# Altium PCB InstallGuide.PcbDoc (part 2 of 2)
Units mil, origin at the board's own origin, x right, y up, seen from the top; angles counter-clockwise.
Board outline 6000 x 4000 mil, 2 copper layers (Top Layer, Bottom Layer); 26 components, 17 nets, 116 pads, 67 vias.
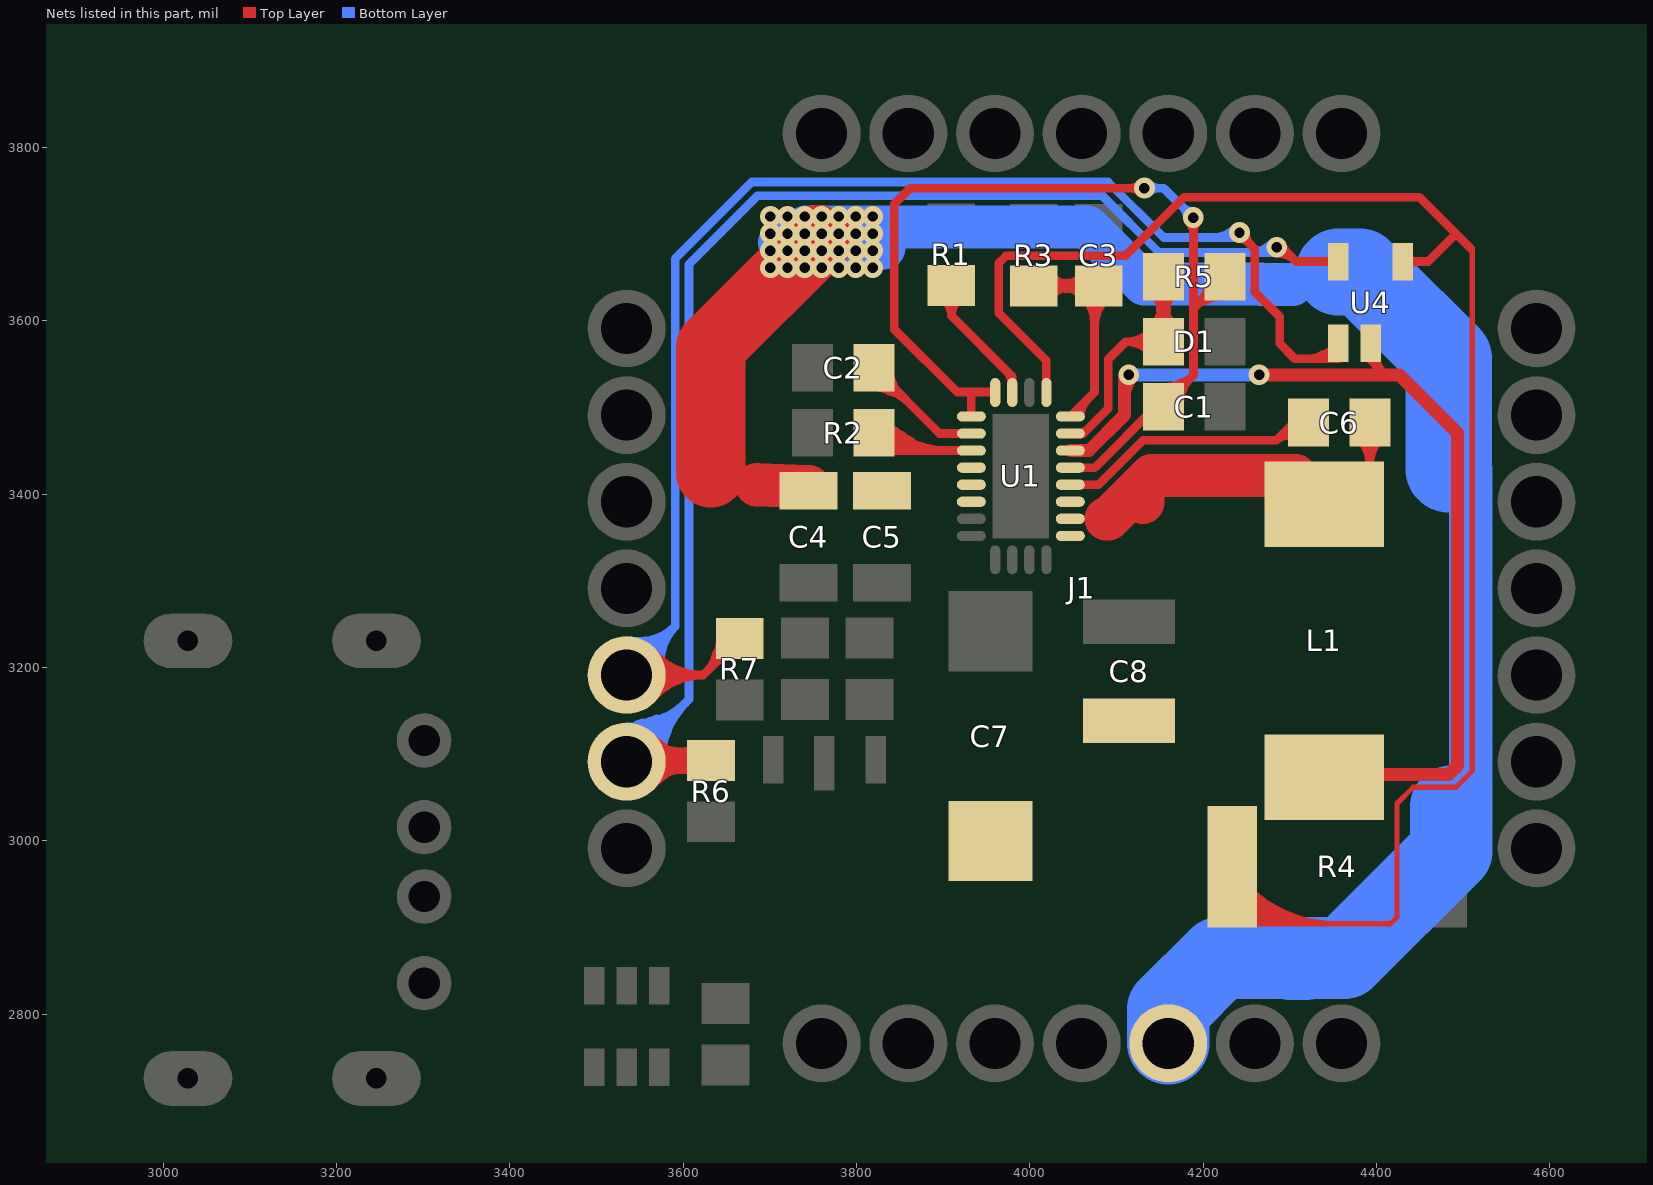
[diagram p2: the nets of this part, all layers, seen from the top]

## Via types
v1: diameter 24, hole 12, Top Layer to Bottom Layer, 62 vias
v2: diameter 35.43, hole 19.68, Top Layer to Bottom Layer, 4 vias
v3: diameter 36, hole 24, Top Layer to Bottom Layer, 1 vias

## Nets (pads, with @x,y where several pads share a name; then routed paths per layer and width w, separated by ;. In a path a pad name is that pad's centre, name@x,y a point inside that pad or via, vN(x,y) a via of type N, cw(c..) or ccw(c..) an arc to the next point about the centre after c; other vN are vias at no path point) (continued)
ISP: C7.1 C8.1 L1.2 R4.1 U1.18 U1.21 U4.1 U4.5 | length 6098.4
  Top Layer w6: R4.1@4231.21,2938.97 cw(c4237.46,2913.89) R4.1@4261.98,2922.02 ; R4.1@4232.66,2933.14 cw(c4239.03,2907.6) 4264.02,2915.88 ; R4.1@4254.8,2949.09 4254.8,2907.56 4257.95,2904.41 4416.22,2904.41 4423.7,2911.89 4423.7,3042.99 4442.6,3061.89 4491.81,3061.89 4510.71,3080.79 4510.71,3681.78 4508.71,3683.78 ; L1.2@4339.72,3073.37 L1.2@4402.11,3073.37 ; R4.1@4226.35,2921.42 ccw(c4267.42,2962.5) 4267.42,2904.41 ; R4.1@4226.35,2921.42 ccw(c4267.42,2962.5) 4267.42,2904.41 ; R4.1@4226.35,2921.42 ccw(c4267.42,2962.5) 4267.42,2904.41 ; R4.1@4230.59,2925.67 ccw(c4281.91,2976.99) 4281.91,2904.41 ; R4.1@4230.59,2925.67 ccw(c4281.91,2976.99) 4281.91,2904.41 ; R4.1@4230.59,2925.67 ccw(c4281.91,2976.99) 4281.91,2904.41 ; R4.1@4234.83,2929.91 ccw(c4296.4,2991.47) 4296.4,2904.41 ; R4.1@4234.83,2929.91 ccw(c4296.4,2991.47) 4296.4,2904.41 ; R4.1@4234.83,2929.91 ccw(c4296.4,2991.47) 4296.4,2904.41 ; R4.1@4239.07,2934.15 ccw(c4310.88,3005.96) 4310.88,2904.41 ; R4.1@4239.07,2934.15 ccw(c4310.88,3005.96) 4310.88,2904.41 ; R4.1@4239.07,2934.15 ccw(c4310.88,3005.96) 4310.88,2904.41 ; R4.1@4242.56,2918.54 cw(c4253.3,2906.04) R4.1@4261.94,2920.07 ; R4.1@4242.56,2918.54 cw(c4253.3,2906.04) R4.1@4261.94,2920.07 ; R4.1@4242.56,2918.54 cw(c4253.3,2906.04) R4.1@4261.94,2920.07 ; R4.1@4243.32,2938.4 ccw(c4325.37,3020.44) 4325.37,2904.41 ; R4.1@4243.32,2938.4 ccw(c4325.37,3020.44) 4325.37,2904.41 ; R4.1@4243.32,2938.4 ccw(c4325.37,3020.44) 4325.37,2904.41 ; R4.1@4244.22,2912.32 cw(c4254.74,2895.78) 4264.54,2912.76 ; R4.1@4244.22,2912.32 cw(c4254.74,2895.78) 4264.54,2912.76 ; R4.1@4244.22,2912.32 cw(c4254.74,2895.78) 4264.54,2912.76 ; R4.1@4244.73,2920.9 cw(c4256.04,2912.76) 4263.92,2924.25 ; R4.1@4244.73,2920.9 cw(c4256.04,2912.76) 4263.92,2924.25 ; R4.1@4244.73,2920.9 cw(c4256.04,2912.76) 4263.92,2924.25 ; R4.1@4245.44,2906.11 cw(c4254.93,2887.71) 4265.28,2905.64 ; R4.1@4245.44,2906.11 cw(c4254.93,2887.71) 4265.28,2905.64 ; R4.1@4245.44,2906.11 cw(c4254.93,2887.71) 4265.28,2905.64 ; R4.1@4246.47,2913.99 cw(c4258.92,2899.5) 4268.93,2915.77 ; R4.1@4246.47,2913.99 cw(c4258.92,2899.5) 4268.93,2915.77 ; R4.1@4246.47,2913.99 cw(c4258.92,2899.5) 4268.93,2915.77 ; R4.1@4247.44,2907.26 cw(c4260.73,2886.35) 4273.11,2907.81 ; R4.1@4247.44,2907.26 cw(c4260.73,2886.35) 4273.11,2907.81 ; R4.1@4247.44,2907.26 cw(c4260.73,2886.35) 4273.11,2907.81 ; R4.1@4247.56,2942.64 ccw(c4339.85,3034.93) 4339.85,2904.41 ; R4.1@4247.56,2942.64 ccw(c4339.85,3034.93) 4339.85,2904.41 ; R4.1@4247.56,2942.64 ccw(c4339.85,3034.93) 4339.85,2904.41 ; R4.1@4249.6,2917.4 cw(c4261.02,2909.17) 4268.98,2920.77 ; R4.1@4249.6,2917.4 cw(c4261.02,2909.17) 4268.98,2920.77 ; R4.1@4249.6,2917.4 cw(c4261.02,2909.17) 4268.98,2920.77 ; R4.1@4250.38,2909.44 cw(c4264.54,2892.96) 4275.93,2911.46 ; R4.1@4250.38,2909.44 cw(c4264.54,2892.96) 4275.93,2911.46 ; R4.1@4250.38,2909.44 cw(c4264.54,2892.96) 4275.93,2911.46 ; R4.1@4251.8,2946.88 ccw(c4354.34,3049.42) 4354.34,2904.41 ; R4.1@4251.8,2946.88 ccw(c4354.34,3049.42) 4354.34,2904.41 ; R4.1@4251.8,2946.88 ccw(c4354.34,3049.42) 4354.34,2904.41 ; R4.1@4252.62,2923.76 ccw(c4264.82,2920.49) R4.1@4258.5,2909.55 ; R4.1@4252.62,2923.76 ccw(c4264.82,2920.49) R4.1@4258.5,2909.55 ; R4.1@4252.62,2923.76 ccw(c4264.82,2920.49) R4.1@4258.5,2909.55 ; R4.1@4252.75,2933.34 ccw(c4274.28,2938.46) 4262.68,2919.62 ; R4.1@4252.75,2933.34 ccw(c4274.28,2938.46) 4262.68,2919.62 ; R4.1@4252.75,2933.34 ccw(c4274.28,2938.46) 4262.68,2919.62 ; R4.1@4253.25,2929.95 ccw(c4273.74,2931.15) 4263.48,2913.37 ; R4.1@4253.25,2929.95 ccw(c4273.74,2931.15) 4263.48,2913.37 ; R4.1@4253.25,2929.95 ccw(c4273.74,2931.15) 4263.48,2913.37 ; R4.1@4254.47,2913.89 cw(c4266,2905.59) 4274.04,2917.3 ; R4.1@4254.47,2913.89 cw(c4266,2905.59) 4274.04,2917.3 ; R4.1@4254.47,2913.89 cw(c4266,2905.59) 4274.04,2917.3 ; R4.1@4258.41,2922.21 ccw(c4272.64,2918.4) 4265.28,2905.64 ; R4.1@4258.41,2922.21 ccw(c4272.64,2918.4) 4265.28,2905.64 ; R4.1@4258.41,2922.21 ccw(c4272.64,2918.4) 4265.28,2905.64 ; R4.1@4258.59,2934.73 ccw(c4294.21,2943.2) 4275.01,2912.02 ; R4.1@4258.59,2934.73 ccw(c4294.21,2943.2) 4275.01,2912.02 ; R4.1@4258.59,2934.73 ccw(c4294.21,2943.2) 4275.01,2912.02 ; R4.1@4258.85,2933.49 ccw(c4274.79,2936.45) 4265.61,2923.09 ; R4.1@4258.85,2933.49 ccw(c4274.79,2936.45) 4265.61,2923.09 ; R4.1@4258.85,2933.49 ccw(c4274.79,2936.45) 4265.61,2923.09 ; R4.1@4259.24,2930.3 ccw(c4287.04,2931.92) 4273.11,2907.81 ; R4.1@4259.24,2930.3 ccw(c4287.04,2931.92) 4273.11,2907.81 ; R4.1@4259.24,2930.3 ccw(c4287.04,2931.92) 4273.11,2907.81
  Top Layer w10: U1.21@4019.25,3517.32 4019.25,3554.17 3964.28,3609.14 3964.28,3666.73 3972.61,3675.06 4110.22,3675.06 4178.08,3742.91 4449.58,3742.91 4491.91,3700.58 ; U4.5@4393.31,3574.02 4393.31,3555.2 4407.14,3541.36 ; U4.1@4430.71,3668.5 4459.84,3668.5 4491.91,3700.58 ; 4508.71,3683.78 4491.91,3700.58 ; U4.5@4400.04,3563.13 ccw(c4425.02,3559.24) 4407.14,3541.36 ; U4.5@4400.04,3563.13 ccw(c4425.02,3559.24) 4407.14,3541.36 ; U4.5@4400.04,3563.13 ccw(c4425.02,3559.24) 4407.14,3541.36 ; U4.1@4435.52,3663.69 cw(c4447.15,3652.06) 4447.15,3668.5 ; U4.1@4435.52,3663.69 cw(c4447.15,3652.06) 4447.15,3668.5 ; U4.1@4435.52,3663.69 cw(c4447.15,3652.06) 4447.15,3668.5 ; U4.1@4435.52,3673.32 ccw(c4447.15,3684.95) 4447.15,3668.5 ; U4.1@4435.52,3673.32 ccw(c4447.15,3684.95) 4447.15,3668.5 ; U4.1@4435.52,3673.32 ccw(c4447.15,3684.95) 4447.15,3668.5
  Top Layer w15: U1.18@4046.81,3450.39 4068.34,3450.39 4109.22,3491.28 4109.22,3532.85 v1(4114.25,3537.87) ; R4.1@4233.74,2970.16 R4.1@4254.8,2949.09 ; v1(4264.65,3537.87) 4426.46,3537.87 4493.89,3470.44 4493.89,3086.81 4483.6,3076.52 4402.11,3076.52 L1.2@4402.11,3073.37 ; 4109.22,3514.87 cw(c4137.25,3514.87) v1@4117.43,3534.69 ; 4109.22,3514.87 cw(c4137.25,3514.87) v1@4117.43,3534.69 ; 4109.22,3514.87 cw(c4137.25,3514.87) v1@4117.43,3534.69 ; v1@4110.7,3535.12 cw(c4103.02,3529.16) 4111.43,3524.3 ; v1@4110.7,3535.12 cw(c4103.02,3529.16) 4111.43,3524.3 ; v1@4110.7,3535.12 cw(c4103.02,3529.16) 4111.43,3524.3
  Bottom Layer w15: v1(4114.25,3537.87) v1(4264.65,3537.87)
NetC1_2: C1.2 R5.1 U1.1 U1.17 U1.24 | length 2297.6
  Top Layer w10: U1.1@3932.64,3489.76 3932.64,3517.95 ; U1.24@3960.2,3517.32 3959.57,3517.95 3932.64,3517.95 ; U1.17@4046.81,3430.71 4075.2,3430.71 4145.35,3500.87 C1.2@4154.29,3500.87 4154.29,3502.68 4188.91,3537.31 ; v1(4132.36,3753.23) 3862.09,3753.23 3843.7,3734.84 3843.7,3590.55 3916.3,3517.95 3932.64,3517.95 ; C1.2@4152.01,3503.15 4154.29,3505.43 C1.2@4154.29,3515.87 ; v1@4188.98,3719.68 4188.91,3719.62 4188.91,3614.62 ; R5.1@4225.16,3650.87 4188.91,3614.62 ; 4115.46,3753.23 cw(c4115.46,3736.33) v1@4127.41,3748.28 ; 4115.46,3753.23 ccw(c4115.46,3770.13) v1@4127.41,3758.18 ; 4115.46,3753.23 cw(c4115.46,3736.33) v1@4127.41,3748.28 ; 4115.46,3753.23 ccw(c4115.46,3770.13) v1@4127.41,3758.18 ; 4115.46,3753.23 cw(c4115.46,3736.33) v1@4127.41,3748.28 ; 4115.46,3753.23 ccw(c4115.46,3770.13) v1@4127.41,3758.18 ; C1.2@4152.96,3505.17 cw(c4186,3495.92) 4177.67,3529.2 ; C1.2@4152.96,3505.17 cw(c4186,3495.92) 4177.67,3529.2 ; C1.2@4152.96,3505.17 cw(c4186,3495.92) 4177.67,3529.2 ; C1.2@4154.43,3513.42 ccw(c4154.84,3538.02) C1.2@4172.23,3520.62 ; C1.2@4154.43,3513.42 ccw(c4154.84,3538.02) C1.2@4172.23,3520.62 ; C1.2@4154.43,3513.42 ccw(c4154.84,3538.02) C1.2@4172.23,3520.62 ; C1.2@4154.51,3503.44 ccw(c4149.79,3532.59) 4178.31,3524.95 ; C1.2@4154.51,3503.44 ccw(c4149.79,3532.59) 4178.31,3524.95 ; C1.2@4154.51,3503.44 ccw(c4149.79,3532.59) 4178.31,3524.95 ; C1.2@4154.6,3523.42 ccw(c4155.38,3570.84) 4188.91,3537.31 ; C1.2@4154.6,3523.42 ccw(c4155.38,3570.84) 4188.91,3537.31 ; C1.2@4154.6,3523.42 ccw(c4155.38,3570.84) 4188.91,3537.31 ; C1.2@4172.91,3504.8 cw(c4212.76,3504.8) 4184.58,3532.98 ; C1.2@4172.91,3504.8 cw(c4212.76,3504.8) 4184.58,3532.98 ; C1.2@4172.91,3504.8 cw(c4212.76,3504.8) 4184.58,3532.98 ; v1@4183.63,3714.34 cw(c4170.88,3701.59) 4188.91,3701.59 ; v1@4183.63,3714.34 cw(c4170.88,3701.59) 4188.91,3701.59 ; v1@4183.63,3714.34 cw(c4170.88,3701.59) 4188.91,3701.59 ; 4188.91,3537.31 4188.91,3614.62 ; 4188.91,3614.62 cw(c4222.12,3581.42) R5.1@4224.29,3628.33 ; 4188.91,3614.62 cw(c4222.12,3581.42) R5.1@4224.29,3628.33 ; 4188.91,3614.62 cw(c4222.12,3581.42) R5.1@4224.29,3628.33 ; 4188.91,3703.19 cw(c4204.68,3703.19) v1@4193.53,3714.34 ; 4188.91,3703.19 cw(c4204.68,3703.19) v1@4193.53,3714.34 ; 4188.91,3703.19 cw(c4204.68,3703.19) v1@4193.53,3714.34 ; 4196.15,3621.86 ccw(c4171.08,3646.93) R5.1@4206.54,3646.93 ; 4196.15,3621.86 ccw(c4171.08,3646.93) R5.1@4206.54,3646.93 ; 4196.15,3621.86 ccw(c4171.08,3646.93) R5.1@4206.54,3646.93 ; 4198.75,3622.74 ccw(c4190.51,3660.39) R5.1@4226.44,3646.43 ; 4198.75,3622.74 ccw(c4190.51,3660.39) R5.1@4226.44,3646.43 ; 4198.75,3622.74 ccw(c4190.51,3660.39) R5.1@4226.44,3646.43 ; R5.1@4204.93,3630.64 cw(c4223.54,3612.02) R5.1@4224.76,3638.32 ; R5.1@4204.93,3630.64 cw(c4223.54,3612.02) R5.1@4224.76,3638.32 ; R5.1@4204.93,3630.64 cw(c4223.54,3612.02) R5.1@4224.76,3638.32
  Bottom Layer w10: v1(4132.36,3753.23) 4154.65,3753.23 v1(4188.58,3719.29) ; v1@4133.15,3751.26 v1@4134.33,3751.26 ; v1@4137.31,3748.28 cw(c4149.26,3736.33) 4149.26,3753.23 ; v1@4137.31,3748.28 cw(c4149.26,3736.33) 4149.26,3753.23 ; v1@4137.31,3748.28 cw(c4149.26,3736.33) 4149.26,3753.23 ; v1@4137.31,3758.18 ccw(c4149.26,3770.13) 4149.26,3753.23 ; v1@4137.31,3758.18 ccw(c4149.26,3770.13) 4149.26,3753.23 ; v1@4137.31,3758.18 ccw(c4149.26,3770.13) 4149.26,3753.23 ; 4176.63,3731.24 cw(c4164.68,3719.29) v1@4181.58,3719.29 ; 4176.63,3731.24 ccw(c4188.58,3743.19) v1@4188.58,3726.29 ; 4176.63,3731.24 cw(c4164.68,3719.29) v1@4181.58,3719.29 ; 4176.63,3731.24 ccw(c4188.58,3743.19) v1@4188.58,3726.29 ; 4176.63,3731.24 cw(c4164.68,3719.29) v1@4181.58,3719.29 ; 4176.63,3731.24 ccw(c4188.58,3743.19) v1@4188.58,3726.29
NetC2_1: C2.1 U1.2 | length 536.7
  Top Layer w10: C2.1@3820.16,3545.87 3895.94,3470.08 U1.2@3932.64,3470.08 ; C2.1@3818.83,3541.56 ccw(c3852.73,3551.01) 3843.62,3517.02 ; C2.1@3818.83,3541.56 ccw(c3852.73,3551.01) 3843.62,3517.02 ; C2.1@3818.83,3541.56 ccw(c3852.73,3551.01) 3843.62,3517.02 ; C2.1@3820.16,3523.31 cw(c3820.16,3468.84) 3858.67,3507.36 ; C2.1@3820.16,3523.31 cw(c3820.16,3468.84) 3858.67,3507.36 ; C2.1@3820.16,3523.31 cw(c3820.16,3468.84) 3858.67,3507.36 ; C2.1@3820.16,3533.31 cw(c3820.16,3502.99) C2.1@3841.6,3524.43 ; C2.1@3820.16,3533.31 cw(c3820.16,3502.99) C2.1@3841.6,3524.43 ; C2.1@3820.16,3533.31 cw(c3820.16,3502.99) C2.1@3841.6,3524.43 ; C2.1@3838.78,3541.93 ccw(c3874.23,3541.93) 3849.16,3516.86 ; C2.1@3838.78,3541.93 ccw(c3874.23,3541.93) 3849.16,3516.86 ; C2.1@3838.78,3541.93 ccw(c3874.23,3541.93) 3849.16,3516.86
NetC3_2: C3.2 R3.2 U1.20 | length 612.5
  Top Layer w10: R3.2@4004.72,3640.43 C3.2@4079.72,3640.43 4074.72,3635.43 4074.72,3517.68 U1.20@4046.81,3489.76 ; R3.2@4021.83,3627.27 cw(c4053.62,3595.48) 4053.62,3640.43 cw(c4053.62,3685.39) R3.2@4021.83,3653.6 ; R3.2@4023.93,3629.77 cw(c4038.96,3619.27) 4043.71,3636.98 ; R3.2@4023.93,3651.1 ccw(c4038.96,3661.6) 4043.71,3643.88 ; R3.2@4024.79,3631.12 cw(c4046.76,3618.44) 4040.19,3642.94 ; R3.2@4024.79,3649.74 ccw(c4046.76,3662.43) 4040.19,3637.92 ; C3.2@4062.62,3653.6 cw(c4030.83,3685.39) 4030.83,3640.43 cw(c4030.83,3595.48) 4062.62,3627.27 cw(c4033.4,3598.04) 4074.72,3598.04 ; 4074.72,3592.91 cw(c4123.31,3592.91) C3.2@4088.96,3627.27 ; U1.20@4048.54,3489.76 cw(c4052.73,3489.76) U1.20@4049.77,3492.72 ; U1.20@4048.54,3489.76 cw(c4052.73,3489.76) U1.20@4049.77,3492.72 ; U1.20@4048.54,3489.76 cw(c4052.73,3489.76) U1.20@4049.77,3492.72 ; U1.20@4058.54,3489.76 cw(c4086.87,3489.76) 4066.84,3509.79 ; U1.20@4058.54,3489.76 cw(c4086.87,3489.76) 4066.84,3509.79 ; U1.20@4058.54,3489.76 cw(c4086.87,3489.76) 4066.84,3509.79
NetC6_1: C6.1 L1.1 U1.13 U1.14 U1.15 | length 473.4
  Top Layer w10: L1.1@4391.34,3414.57 4392.52,3415.75 C6.1@4392.52,3482.68 ; L1.1@4392.52,3433.78 cw(c4437.48,3433.78) 4405.69,3465.57 ccw(c4437.48,3433.78) L1.1@4392.52,3433.78 ; L1.1@4392.52,3433.78 ccw(c4347.56,3433.78) 4379.35,3465.57 cw(c4347.56,3433.78) L1.1@4392.52,3433.78
  Top Layer w50: 4088.19,3371.65 4090.94,3371.65 4130.4,3411.11 ; 4127.32,3393.98 4130.4,3390.89 4130.4,3411.11 ; L1.1@4306.44,3421.65 4140.94,3421.65 4130.4,3411.11
NetC6_2: C6.2 U1.16 | length 404.5
  Top Layer w10: U1.16@4046.81,3411.02 4079.4,3411.02 4130.69,3462.31 4284.75,3462.31 ; C6.2@4311.42,3488.98 4284.75,3462.31 ; 4284.75,3462.31 cw(c4298.48,3448.58) 4310.31,3463.97 ccw(c4298.48,3448.58) 4284.75,3462.31 ; 4292.81,3470.37 cw(c4305.48,3457.69) 4316.4,3471.9 ccw(c4305.48,3457.69) 4292.81,3470.37
NetD1_1: D1.1 R5.2 U1.19 | length 1676.7
  Top Layer w10: U1.19@4046.81,3470.08 4061.86,3470.08 4090.72,3498.94 4090.72,3555.87 4110.72,3575.87 D1.1@4154.29,3575.87 R5.2@4154.29,3650.87 ; U1.19@4057.64,3470.98 ccw(c4057.64,3483.37) 4066.39,3474.61 ; U1.19@4057.64,3470.98 ccw(c4057.64,3483.37) 4066.39,3474.61 ; U1.19@4057.64,3470.98 ccw(c4057.64,3483.37) 4066.39,3474.61 ; 4110.73,3575.87 cw(c4110.73,3534.22) D1.1@4140.83,3563 ; 4110.73,3575.87 ccw(c4110.73,3617.51) D1.1@4140.83,3588.73 ; 4110.73,3575.87 cw(c4110.73,3534.22) D1.1@4140.83,3563 ; 4110.73,3575.87 ccw(c4110.73,3617.51) D1.1@4140.83,3588.73 ; 4110.73,3575.87 cw(c4110.73,3534.22) D1.1@4140.83,3563 ; 4110.73,3575.87 ccw(c4110.73,3617.51) D1.1@4140.83,3588.73 ; D1.1@4141.12,3592.97 ccw(c4109.33,3624.76) R5.2@4154.29,3624.76 ; D1.1@4141.12,3592.97 ccw(c4109.33,3624.76) R5.2@4154.29,3624.76 ; D1.1@4141.12,3592.97 ccw(c4109.33,3624.76) R5.2@4154.29,3624.76 ; R5.2@4141.12,3633.76 cw(c4109.33,3601.97) D1.1@4154.29,3601.97 ; R5.2@4141.12,3633.76 cw(c4109.33,3601.97) D1.1@4154.29,3601.97 ; R5.2@4141.12,3633.76 cw(c4109.33,3601.97) D1.1@4154.29,3601.97 ; D1.1@4143.63,3595.07 ccw(c4133.13,3610.1) 4150.84,3614.85 ; D1.1@4143.63,3595.07 ccw(c4133.13,3610.1) 4150.84,3614.85 ; D1.1@4143.63,3595.07 ccw(c4133.13,3610.1) 4150.84,3614.85 ; R5.2@4143.63,3631.66 cw(c4133.13,3616.63) 4150.84,3611.88 ; R5.2@4143.63,3631.66 cw(c4133.13,3616.63) 4150.84,3611.88 ; R5.2@4143.63,3631.66 cw(c4133.13,3616.63) 4150.84,3611.88 ; R5.2@4143.63,3631.66 cw(c4133.13,3616.63) 4150.84,3611.88 ; R5.2@4143.63,3631.66 cw(c4133.13,3616.63) 4150.84,3611.88 ; R5.2@4143.63,3631.66 cw(c4133.13,3616.63) 4150.84,3611.88 ; D1.1@4144.98,3595.93 ccw(c4132.3,3617.9) 4156.8,3611.33 ; D1.1@4144.98,3595.93 ccw(c4132.3,3617.9) 4156.8,3611.33 ; D1.1@4144.98,3595.93 ccw(c4132.3,3617.9) 4156.8,3611.33 ; R5.2@4144.98,3630.8 cw(c4132.3,3608.83) 4156.8,3615.4 ; R5.2@4144.98,3630.8 cw(c4132.3,3608.83) 4156.8,3615.4 ; R5.2@4144.98,3630.8 cw(c4132.3,3608.83) 4156.8,3615.4 ; R5.2@4144.98,3630.8 cw(c4132.3,3608.83) 4156.8,3615.4 ; R5.2@4144.98,3630.8 cw(c4132.3,3608.83) 4156.8,3615.4 ; R5.2@4144.98,3630.8 cw(c4132.3,3608.83) 4156.8,3615.4 ; 4151.78,3611.33 ccw(c4176.29,3617.9) D1.1@4163.6,3595.93 ; 4151.78,3611.33 ccw(c4176.29,3617.9) D1.1@4163.6,3595.93 ; 4151.78,3611.33 ccw(c4176.29,3617.9) D1.1@4163.6,3595.93 ; 4151.78,3615.4 cw(c4176.29,3608.83) R5.2@4163.6,3630.8 ; 4151.78,3615.4 cw(c4176.29,3608.83) R5.2@4163.6,3630.8 ; 4151.78,3615.4 cw(c4176.29,3608.83) R5.2@4163.6,3630.8 ; 4151.78,3615.4 cw(c4176.29,3608.83) R5.2@4163.6,3630.8 ; 4151.78,3615.4 cw(c4176.29,3608.83) R5.2@4163.6,3630.8 ; 4151.78,3615.4 cw(c4176.29,3608.83) R5.2@4163.6,3630.8 ; D1.1@4154.29,3601.97 cw(c4199.25,3601.97) R5.2@4167.46,3633.76 ; D1.1@4154.29,3601.97 cw(c4199.25,3601.97) R5.2@4167.46,3633.76 ; D1.1@4154.29,3601.97 cw(c4199.25,3601.97) R5.2@4167.46,3633.76 ; R5.2@4154.29,3624.76 ccw(c4199.25,3624.76) D1.1@4167.46,3592.97 ; R5.2@4154.29,3624.76 ccw(c4199.25,3624.76) D1.1@4167.46,3592.97 ; R5.2@4154.29,3624.76 ccw(c4199.25,3624.76) D1.1@4167.46,3592.97 ; 4157.74,3611.88 cw(c4175.46,3616.63) R5.2@4164.95,3631.66 ; 4157.74,3611.88 cw(c4175.46,3616.63) R5.2@4164.95,3631.66 ; 4157.74,3611.88 cw(c4175.46,3616.63) R5.2@4164.95,3631.66 ; 4157.74,3611.88 cw(c4175.46,3616.63) R5.2@4164.95,3631.66 ; 4157.74,3611.88 cw(c4175.46,3616.63) R5.2@4164.95,3631.66 ; 4157.74,3611.88 cw(c4175.46,3616.63) R5.2@4164.95,3631.66 ; 4157.74,3614.85 ccw(c4175.45,3610.1) D1.1@4164.95,3595.07 ; 4157.74,3614.85 ccw(c4175.45,3610.1) D1.1@4164.95,3595.07 ; 4157.74,3614.85 ccw(c4175.45,3610.1) D1.1@4164.95,3595.07
NetR1_1: R1.1 U1.23 | length 329.9
  Top Layer w10: R1.1@3909.72,3630.43 3909.72,3605.87 ; U1.23@3979.88,3517.32 3979.88,3535.71 3909.72,3605.87 ; R1.1@3899.2,3625.53 cw(c3886.1,3605.87) 3909.72,3605.87 ; R1.1@3899.2,3625.53 cw(c3886.1,3605.87) 3909.72,3605.87 ; R1.1@3899.2,3625.53 cw(c3886.1,3605.87) 3909.72,3605.87 ; 3909.72,3605.87 cw(c3933.86,3605.87) R1.1@3920.12,3625.71 ; 3909.72,3605.87 cw(c3933.86,3605.87) R1.1@3920.12,3625.71 ; 3909.72,3605.87 cw(c3933.86,3605.87) R1.1@3920.12,3625.71 ; 3972.99,3542.6 cw(c3958.54,3528.15) U1.23@3978.98,3528.15 ; 3972.99,3542.6 cw(c3958.54,3528.15) U1.23@3978.98,3528.15 ; 3972.99,3542.6 cw(c3958.54,3528.15) U1.23@3978.98,3528.15
NetR2_1: R2.1 U1.3 | length 1117.2
  Top Layer w10: R2.1@3820.16,3470.87 3840.63,3450.39 U1.3@3932.64,3450.39 ; R2.1@3819.05,3467.75 cw(c3834.67,3456.21) 3845.11,3472.59 ; R2.1@3819.05,3467.75 cw(c3834.67,3456.21) 3845.11,3472.59 ; R2.1@3819.05,3467.75 cw(c3834.67,3456.21) 3845.11,3472.59 ; R2.1@3819.18,3465.95 ccw(c3856.75,3503.52) 3856.75,3450.39 ; R2.1@3819.18,3465.95 ccw(c3856.75,3503.52) 3856.75,3450.39 ; R2.1@3819.18,3465.95 ccw(c3856.75,3503.52) 3856.75,3450.39 ; R2.1@3825.87,3460.47 cw(c3836.61,3448.35) 3844.7,3462.37 ; R2.1@3825.87,3460.47 cw(c3836.61,3448.35) 3844.7,3462.37 ; R2.1@3825.87,3460.47 cw(c3836.61,3448.35) 3844.7,3462.37 ; R2.1@3826.25,3473.03 ccw(c3880.89,3527.66) 3880.89,3450.39 ; R2.1@3826.25,3473.03 ccw(c3880.89,3527.66) 3880.89,3450.39 ; R2.1@3826.25,3473.03 ccw(c3880.89,3527.66) 3880.89,3450.39 ; R2.1@3827.09,3461.81 cw(c3843.31,3449.83) 3854.14,3466.83 ; R2.1@3827.09,3461.81 cw(c3843.31,3449.83) 3854.14,3466.83 ; R2.1@3827.09,3461.81 cw(c3843.31,3449.83) 3854.14,3466.83 ; R2.1@3832.5,3452.99 cw(c3846.31,3437.39) 3856.73,3455.43 ; R2.1@3832.5,3452.99 cw(c3846.31,3437.39) 3856.73,3455.43 ; R2.1@3832.5,3452.99 cw(c3846.31,3437.39) 3856.73,3455.43 ; R2.1@3833.33,3480.1 ccw(c3905.03,3551.81) 3905.03,3450.39 ; R2.1@3833.33,3480.1 ccw(c3905.03,3551.81) 3905.03,3450.39 ; R2.1@3833.33,3480.1 ccw(c3905.03,3551.81) 3905.03,3450.39 ; R2.1@3835.14,3455.87 cw(c3851.95,3443.45) 3863.18,3461.07 ; R2.1@3835.14,3455.87 cw(c3851.95,3443.45) 3863.18,3461.07 ; R2.1@3835.14,3455.87 cw(c3851.95,3443.45) 3863.18,3461.07 ; R2.1@3838.14,3471.75 ccw(c3854.1,3476.03) 3845.84,3461.72 ; R2.1@3838.14,3471.75 ccw(c3854.1,3476.03) 3845.84,3461.72 ; R2.1@3838.14,3471.75 ccw(c3854.1,3476.03) 3845.84,3461.72
SCL: J1.27 R6.1 U4.3 | length 5178.4
  Top Layer w10: J1.27@3534.84,3091.34 3536.42,3092.91 R6.1@3632.28,3092.91 ; v1(4285.04,3685.04) 4285.04,3691.34 4307.87,3668.5 U4.3@4355.91,3668.5 ; J1.27@3549.28,3077.5 cw(c3585.41,3042.88) 3585.41,3092.91 ; J1.27@3549.28,3077.5 cw(c3585.41,3042.88) 3585.41,3092.91 ; J1.27@3549.28,3077.5 cw(c3585.41,3042.88) 3585.41,3092.91 ; J1.27@3556.06,3112.55 ccw(c3603.47,3159.96) 3603.47,3092.91 ; J1.27@3556.06,3112.55 ccw(c3603.47,3159.96) 3603.47,3092.91 ; J1.27@3556.06,3112.55 ccw(c3603.47,3159.96) 3603.47,3092.91 ; J1.27@3556.5,3070.58 cw(c3608.84,3020.41) R6.1@3608.84,3092.91 ; J1.27@3556.5,3070.58 cw(c3608.84,3020.41) R6.1@3608.84,3092.91 ; J1.27@3556.5,3070.58 cw(c3608.84,3020.41) R6.1@3608.84,3092.91 ; J1.27@3563.13,3119.62 ccw(c3627.61,3184.11) R6.1@3627.61,3092.91 ; J1.27@3563.13,3119.62 ccw(c3627.61,3184.11) R6.1@3627.61,3092.91 ; J1.27@3563.13,3119.62 ccw(c3627.61,3184.11) R6.1@3627.61,3092.91 ; J1.27@3563.72,3063.66 cw(c3632.28,2997.95) R6.1@3632.28,3092.91 ; J1.27@3563.72,3063.66 cw(c3632.28,2997.95) R6.1@3632.28,3092.91 ; J1.27@3563.72,3063.66 cw(c3632.28,2997.95) R6.1@3632.28,3092.91 ; 3583.1,3079.74 ccw(c3570.74,3125.83) R6.1@3612.18,3102.15 ; 3583.1,3079.74 ccw(c3570.74,3125.83) R6.1@3612.18,3102.15 ; 3583.1,3079.74 ccw(c3570.74,3125.83) R6.1@3612.18,3102.15 ; 3583.39,3092.91 cw(c3583.39,3047.96) R6.1@3615.18,3079.75 ; 3583.39,3092.91 ccw(c3583.39,3137.87) R6.1@3615.18,3106.08 ; 3583.39,3092.91 cw(c3583.39,3047.96) R6.1@3615.18,3079.75 ; 3583.39,3092.91 ccw(c3583.39,3137.87) R6.1@3615.18,3106.08 ; 3583.39,3092.91 cw(c3583.39,3047.96) R6.1@3615.18,3079.75 ; 3583.39,3092.91 ccw(c3583.39,3137.87) R6.1@3615.18,3106.08 ; 3584.36,3086.99 cw(c3592.58,3052.99) R6.1@3615.92,3079.04 ; 3584.36,3086.99 cw(c3592.58,3052.99) R6.1@3615.92,3079.04 ; 3584.36,3086.99 cw(c3592.58,3052.99) R6.1@3615.92,3079.04 ; 3584.43,3104.48 ccw(c3596.23,3148.54) R6.1@3619.04,3109.04 ; 3584.43,3104.48 ccw(c3596.23,3148.54) R6.1@3619.04,3109.04 ; 3584.43,3104.48 ccw(c3596.23,3148.54) R6.1@3619.04,3109.04 ; 3585.32,3104.25 cw(c3573.85,3061.45) R6.1@3612.22,3083.6 ; 3585.32,3104.25 cw(c3573.85,3061.45) R6.1@3612.22,3083.6 ; 3585.32,3104.25 cw(c3573.85,3061.45) R6.1@3612.22,3083.6 ; 3587.56,3080.93 cw(c3598.29,3040.86) R6.1@3619.04,3076.79 ; 3587.56,3080.93 cw(c3598.29,3040.86) R6.1@3619.04,3076.79 ; 3587.56,3080.93 cw(c3598.29,3040.86) R6.1@3619.04,3076.79 ; 3594.34,3089.4 ccw(c3587.45,3117.87) R6.1@3612.45,3102.61 ; 3594.34,3089.4 ccw(c3587.45,3117.87) R6.1@3612.45,3102.61 ; 3594.34,3089.4 ccw(c3587.45,3117.87) R6.1@3612.45,3102.61 ; 3602.84,3091.46 cw(c3607.99,3070.19) R6.1@3622.59,3086.49 ; 3602.84,3091.46 cw(c3607.99,3070.19) R6.1@3622.59,3086.49 ; 3602.84,3091.46 cw(c3607.99,3070.19) R6.1@3622.59,3086.49 ; v1@4285.04,3678.04 cw(c4285.04,3645.93) 4307.74,3668.64 ; v1@4285.04,3678.04 cw(c4285.04,3645.93) 4307.74,3668.64 ; v1@4285.04,3678.04 cw(c4285.04,3645.93) 4307.74,3668.64 ; 4339.46,3668.5 cw(c4339.46,3652.06) U4.3@4351.09,3663.69 ; 4339.46,3668.5 ccw(c4339.46,3684.95) U4.3@4351.09,3673.32 ; 4339.46,3668.5 cw(c4339.46,3652.06) U4.3@4351.09,3663.69 ; 4339.46,3668.5 ccw(c4339.46,3684.95) U4.3@4351.09,3673.32 ; 4339.46,3668.5 cw(c4339.46,3652.06) U4.3@4351.09,3663.69 ; 4339.46,3668.5 ccw(c4339.46,3684.95) U4.3@4351.09,3673.32
  Bottom Layer w10: v1(4285.04,3685.04) 4278.97,3678.97 4149.19,3678.97 4083.82,3744.34 3685.86,3744.34 3606.84,3665.32 3606.84,3163.34 J1.27@3534.84,3091.34 ; J1.27@3515.25,3095.35 cw(c3567.88,3084.57) 3553.97,3136.47 ; J1.27@3515.25,3095.35 cw(c3567.88,3084.57) 3553.97,3136.47 ; J1.27@3515.25,3095.35 cw(c3567.88,3084.57) 3553.97,3136.47 ; J1.27@3525.05,3093.34 cw(c3585.61,3080.94) 3569.61,3140.65 ; J1.27@3525.05,3093.34 cw(c3585.61,3080.94) 3569.61,3140.65 ; J1.27@3525.05,3093.34 cw(c3585.61,3080.94) 3569.61,3140.65 ; J1.27@3534.84,3091.34 cw(c3603.33,3077.31) 3585.24,3144.84 ; J1.27@3534.84,3091.34 cw(c3603.33,3077.31) 3585.24,3144.84 ; J1.27@3534.84,3091.34 cw(c3603.33,3077.31) 3585.24,3144.84 ; J1.27@3534.84,3111.34 ccw(c3534.84,3159.62) 3568.98,3125.48 ; J1.27@3534.84,3111.34 ccw(c3534.84,3159.62) 3568.98,3125.48 ; J1.27@3534.84,3111.34 ccw(c3534.84,3159.62) 3568.98,3125.48 ; J1.27@3534.84,3121.34 ccw(c3534.84,3193.76) 3586.06,3142.55 ; J1.27@3534.84,3121.34 ccw(c3534.84,3193.76) 3586.06,3142.55 ; J1.27@3534.84,3121.34 ccw(c3534.84,3193.76) 3586.06,3142.55 ; J1.27@3534.84,3131.34 ccw(c3534.84,3227.91) 3603.13,3159.62 ; J1.27@3534.84,3131.34 ccw(c3534.84,3227.91) 3603.13,3159.62 ; J1.27@3534.84,3131.34 ccw(c3534.84,3227.91) 3603.13,3159.62 ; J1.27@3554.84,3091.34 cw(c3603.13,3091.34) 3568.98,3125.48 ; J1.27@3554.84,3091.34 cw(c3603.13,3091.34) 3568.98,3125.48 ; J1.27@3554.84,3091.34 cw(c3603.13,3091.34) 3568.98,3125.48 ; J1.27@3564.84,3091.34 cw(c3637.27,3091.34) 3586.06,3142.55 ; J1.27@3564.84,3091.34 cw(c3637.27,3091.34) 3586.06,3142.55 ; J1.27@3564.84,3091.34 cw(c3637.27,3091.34) 3586.06,3142.55 ; J1.27@3574.84,3091.34 cw(c3671.41,3091.34) 3603.13,3159.62 ; J1.27@3574.84,3091.34 cw(c3671.41,3091.34) 3603.13,3159.62 ; J1.27@3574.84,3091.34 cw(c3671.41,3091.34) 3603.13,3159.62 ; 4253.48,3678.97 ccw(c4253.48,3716.6) v1@4280.09,3689.99 ; 4253.48,3678.97 ccw(c4253.48,3716.6) v1@4280.09,3689.99 ; 4253.48,3678.97 ccw(c4253.48,3716.6) v1@4280.09,3689.99
SDA: J1.26 R7.1 U4.4 | length 3620.8
  Top Layer w10: J1.26@3534.84,3191.34 3623.23,3191.34 R7.1@3665.35,3233.46 ; v1@4237.2,3705.71 4259.78,3683.13 4259.78,3633.46 4288.35,3604.89 4288.35,3573.93 4305.91,3556.37 U4.4@4356.69,3556.37 ; J1.26@3557.38,3171.54 cw(c3601.13,3133.11) 3601.13,3191.34 ; J1.26@3557.38,3171.54 cw(c3601.13,3133.11) 3601.13,3191.34 ; J1.26@3557.38,3171.54 cw(c3601.13,3133.11) 3601.13,3191.34 ; J1.26@3557.38,3211.14 ccw(c3601.13,3249.57) 3601.13,3191.34 ; J1.26@3557.38,3211.14 ccw(c3601.13,3249.57) 3601.13,3191.34 ; J1.26@3557.38,3211.14 ccw(c3601.13,3249.57) 3601.13,3191.34 ; J1.26@3564.89,3164.94 cw(c3623.22,3113.7) 3623.22,3191.34 ; J1.26@3564.89,3164.94 cw(c3623.22,3113.7) 3623.22,3191.34 ; J1.26@3564.89,3164.94 cw(c3623.22,3113.7) 3623.22,3191.34 ; J1.26@3564.89,3217.74 ccw(c3623.22,3268.98) 3623.22,3191.34 ; J1.26@3564.89,3217.74 ccw(c3623.22,3268.98) 3623.22,3191.34 ; J1.26@3564.89,3217.74 ccw(c3623.22,3268.98) 3623.22,3191.34 ; 3626.84,3194.95 ccw(c3588.33,3233.46) R7.1@3642.8,3233.46 ; 3626.84,3194.95 ccw(c3588.33,3233.46) R7.1@3642.8,3233.46 ; 3626.84,3194.95 ccw(c3588.33,3233.46) R7.1@3642.8,3233.46 ; 3636.35,3204.46 cw(c3661.42,3179.39) R7.1@3661.42,3214.84 ; 3636.35,3204.46 cw(c3661.42,3179.39) R7.1@3661.42,3214.84 ; 3636.35,3204.46 cw(c3661.42,3179.39) R7.1@3661.42,3214.84 ; 3636.51,3210 cw(c3670.5,3200.89) R7.1@3661.05,3234.79 ; 3636.51,3210 cw(c3670.5,3200.89) R7.1@3661.05,3234.79 ; 3636.51,3210 cw(c3670.5,3200.89) R7.1@3661.05,3234.79 ; R7.1@3643.91,3212.02 ccw(c3622.48,3233.46) R7.1@3652.8,3233.46 ; R7.1@3643.91,3212.02 ccw(c3622.48,3233.46) R7.1@3652.8,3233.46 ; R7.1@3643.91,3212.02 ccw(c3622.48,3233.46) R7.1@3652.8,3233.46 ; v1@4242.02,3694.97 cw(c4242.02,3680.65) 4252.14,3690.78 ; v1@4242.02,3694.97 cw(c4242.02,3680.65) 4252.14,3690.78 ; v1@4242.02,3694.97 cw(c4242.02,3680.65) 4252.14,3690.78 ; v1@4249.02,3701.97 ccw(c4268.5,3701.97) 4254.72,3688.19 ; v1@4249.02,3701.97 ccw(c4268.5,3701.97) 4254.72,3688.19 ; v1@4249.02,3701.97 ccw(c4268.5,3701.97) 4254.72,3688.19 ; 4320.63,3556.37 ccw(c4320.63,3599.45) U4.4@4351.09,3568.99 ; 4320.63,3556.37 ccw(c4320.63,3599.45) U4.4@4351.09,3568.99 ; 4320.63,3556.37 ccw(c4320.63,3599.45) U4.4@4351.09,3568.99 ; 4335.07,3559.74 cw(c4342.68,3546.57) U4.4@4351.81,3558.73 ; 4335.07,3559.74 cw(c4342.68,3546.57) U4.4@4351.81,3558.73 ; 4335.07,3559.74 cw(c4342.68,3546.57) U4.4@4351.81,3558.73 ; U4.4@4344.78,3556.37 ccw(c4344.78,3575.3) U4.4@4358.16,3561.92 ; U4.4@4344.78,3556.37 ccw(c4344.78,3575.3) U4.4@4358.16,3561.92 ; U4.4@4344.78,3556.37 ccw(c4344.78,3575.3) U4.4@4358.16,3561.92
  Bottom Layer w10: J1.26@3534.84,3191.34 3590.84,3247.34 ; v1(4242.02,3701.97) 4236.34,3696.29 4154.5,3696.29 4090.45,3760.34 3679.24,3760.34 3590.84,3671.94 3590.84,3247.34 ; J1.26@3539.33,3221 ccw(c3545.87,3264.3) 3576.84,3233.34 ; J1.26@3539.33,3221 ccw(c3545.87,3264.3) 3576.84,3233.34 ; J1.26@3539.33,3221 ccw(c3545.87,3264.3) 3576.84,3233.34 ; J1.26@3540.82,3230.89 ccw(c3549.55,3288.62) 3590.84,3247.34 ; J1.26@3540.82,3230.89 ccw(c3549.55,3288.62) 3590.84,3247.34 ; J1.26@3540.82,3230.89 ccw(c3549.55,3288.62) 3590.84,3247.34 ; J1.26@3564.51,3195.82 cw(c3607.81,3202.37) 3576.84,3233.34 ; J1.26@3564.51,3195.82 cw(c3607.81,3202.37) 3576.84,3233.34 ; J1.26@3564.51,3195.82 cw(c3607.81,3202.37) 3576.84,3233.34 ; J1.26@3574.39,3197.32 cw(c3632.13,3206.05) 3590.84,3247.34 ; J1.26@3574.39,3197.32 cw(c3632.13,3206.05) 3590.84,3247.34 ; J1.26@3574.39,3197.32 cw(c3632.13,3206.05) 3590.84,3247.34 ; 4211.41,3696.29 ccw(c4211.41,3732.57) v1@4237.07,3706.92 ; 4211.41,3696.29 ccw(c4211.41,3732.57) v1@4237.07,3706.92 ; 4211.41,3696.29 ccw(c4211.41,3732.57) v1@4237.07,3706.92
VIN: C4.2 C5.2 J1.5 U1.4 U1.5 U1.6 | length 4019.2
  Top Layer w50: 3685.13,3411.1 3744.91,3408.75 C4.2@3745.12,3408.74
  Top Layer w80: 3631.72,3424.8 3631.72,3569.89 v1@3755.52,3693.69
  Bottom Layer w50: v1@3741.73,3708.34 4066.54,3708.34 4132.27,3642.6 4266.67,3642.6 4267.23,3642.04 4302.85,3642.04 ; 4507.83,3041.3 4508.84,3042.31 4508.84,3429.13 ; 3711.28,3690.29 cw(c3754.84,3646.73) v1@3754.84,3708.34 ; 3711.28,3690.29 cw(c3754.84,3646.73) v1@3754.84,3708.34 ; 3711.28,3690.29 cw(c3754.84,3646.73) v1@3754.84,3708.34 ; v1@3717.11,3688.23 ccw(c3721.65,3705.18) 3730.43,3689.98 ; v1@3717.11,3688.23 ccw(c3721.65,3705.18) 3730.43,3689.98 ; v1@3717.11,3688.23 ccw(c3721.65,3705.18) 3730.43,3689.98 ; v1@3727.6,3684.47 cw(c3738.7,3681.49) v1@3732.95,3691.44 ; v1@3727.6,3684.47 cw(c3738.7,3681.49) v1@3732.95,3691.44 ; v1@3727.6,3684.47 cw(c3738.7,3681.49) v1@3732.95,3691.44 ; 3730.97,3690.29 cw(c3774.53,3646.73) v1@3774.53,3708.34 ; 3730.97,3690.29 cw(c3774.53,3646.73) v1@3774.53,3708.34 ; 3730.97,3690.29 cw(c3774.53,3646.73) v1@3774.53,3708.34 ; v1@3736.79,3688.23 ccw(c3741.34,3705.18) 3750.11,3689.98 ; v1@3736.79,3688.23 ccw(c3741.34,3705.18) 3750.11,3689.98 ; v1@3736.79,3688.23 ccw(c3741.34,3705.18) 3750.11,3689.98 ; v1@3745.16,3708.34 cw(c3745.16,3646.73) 3788.72,3690.29 ; v1@3745.16,3708.34 cw(c3745.16,3646.73) 3788.72,3690.29 ; v1@3745.16,3708.34 cw(c3745.16,3646.73) 3788.72,3690.29 ; v1@3747.29,3684.47 cw(c3758.38,3681.49) v1@3752.64,3691.44 ; v1@3747.29,3684.47 cw(c3758.38,3681.49) v1@3752.64,3691.44 ; v1@3747.29,3684.47 cw(c3758.38,3681.49) v1@3752.64,3691.44 ; 3750.65,3690.29 cw(c3794.21,3646.73) v1@3794.21,3708.34 ; 3750.65,3690.29 cw(c3794.21,3646.73) v1@3794.21,3708.34 ; 3750.65,3690.29 cw(c3794.21,3646.73) v1@3794.21,3708.34 ; v1@3756.48,3688.23 ccw(c3761.02,3705.18) 3769.8,3689.98 ; v1@3756.48,3688.23 ccw(c3761.02,3705.18) 3769.8,3689.98 ; v1@3756.48,3688.23 ccw(c3761.02,3705.18) 3769.8,3689.98 ; v1@3764.84,3708.34 cw(c3764.84,3646.73) 3808.4,3690.29 ; v1@3764.84,3708.34 cw(c3764.84,3646.73) 3808.4,3690.29 ; v1@3764.84,3708.34 cw(c3764.84,3646.73) 3808.4,3690.29 ; v1@3766.97,3684.47 cw(c3778.07,3681.49) v1@3772.32,3691.44 ; v1@3766.97,3684.47 cw(c3778.07,3681.49) v1@3772.32,3691.44 ; v1@3766.97,3684.47 cw(c3778.07,3681.49) v1@3772.32,3691.44 ; 3770.34,3690.29 cw(c3813.9,3646.73) v1@3813.9,3708.34 ; 3770.34,3690.29 cw(c3813.9,3646.73) v1@3813.9,3708.34 ; 3770.34,3690.29 cw(c3813.9,3646.73) v1@3813.9,3708.34 ; v1@3776.16,3688.23 ccw(c3780.71,3705.18) 3789.48,3689.98 ; v1@3776.16,3688.23 ccw(c3780.71,3705.18) 3789.48,3689.98 ; v1@3776.16,3688.23 ccw(c3780.71,3705.18) 3789.48,3689.98 ; v1@3784.53,3708.34 cw(c3784.53,3646.73) 3828.09,3690.29 ; v1@3784.53,3708.34 cw(c3784.53,3646.73) 3828.09,3690.29 ; v1@3784.53,3708.34 cw(c3784.53,3646.73) 3828.09,3690.29 ; v1@3786.66,3684.47 cw(c3797.75,3681.49) v1@3792.01,3691.44 ; v1@3786.66,3684.47 cw(c3797.75,3681.49) v1@3792.01,3691.44 ; v1@3786.66,3684.47 cw(c3797.75,3681.49) v1@3792.01,3691.44 ; v1@3786.73,3691.44 cw(c3780.99,3681.49) v1@3792.08,3684.47 ; v1@3786.73,3691.44 cw(c3780.99,3681.49) v1@3792.08,3684.47 ; v1@3786.73,3691.44 cw(c3780.99,3681.49) v1@3792.08,3684.47 ; 3789.26,3689.98 ccw(c3798.03,3705.18) v1@3802.58,3688.23 ; 3789.26,3689.98 ccw(c3798.03,3705.18) v1@3802.58,3688.23 ; 3789.26,3689.98 ccw(c3798.03,3705.18) v1@3802.58,3688.23 ; 3789.26,3689.98 ccw(c3798.03,3705.18) v1@3802.58,3688.23 ; 3789.26,3689.98 ccw(c3798.03,3705.18) v1@3802.58,3688.23 ; 3789.26,3689.98 ccw(c3798.03,3705.18) v1@3802.58,3688.23 ; 3790.02,3690.29 cw(c3833.58,3646.73) 3833.58,3708.34 ; 3790.02,3690.29 cw(c3833.58,3646.73) 3833.58,3708.34 ; 3790.02,3690.29 cw(c3833.58,3646.73) 3833.58,3708.34 ; v1@3795.85,3688.23 ccw(c3800.39,3705.18) 3809.17,3689.98 ; v1@3795.85,3688.23 ccw(c3800.39,3705.18) 3809.17,3689.98 ; v1@3795.85,3688.23 ccw(c3800.39,3705.18) 3809.17,3689.98 ; v1@3806.34,3684.47 cw(c3817.44,3681.49) v1@3811.69,3691.44 ; v1@3806.34,3684.47 cw(c3817.44,3681.49) v1@3811.69,3691.44 ; v1@3806.34,3684.47 cw(c3817.44,3681.49) v1@3811.69,3691.44 ; v1@3806.42,3691.44 cw(c3800.67,3681.49) v1@3811.77,3684.47 ; v1@3806.42,3691.44 cw(c3800.67,3681.49) v1@3811.77,3684.47 ; v1@3806.42,3691.44 cw(c3800.67,3681.49) v1@3811.77,3684.47 ; 3808.94,3689.98 ccw(c3817.72,3705.18) v1@3822.26,3688.23 ; 3808.94,3689.98 ccw(c3817.72,3705.18) v1@3822.26,3688.23 ; 3808.94,3689.98 ccw(c3817.72,3705.18) v1@3822.26,3688.23 ; 3808.94,3689.98 ccw(c3817.72,3705.18) v1@3822.26,3688.23 ; 3808.94,3689.98 ccw(c3817.72,3705.18) v1@3822.26,3688.23 ; 3808.94,3689.98 ccw(c3817.72,3705.18) v1@3822.26,3688.23 ; 3809.71,3690.29 cw(c3853.27,3646.73) 3853.27,3708.34 ; 3809.71,3690.29 cw(c3853.27,3646.73) 3853.27,3708.34 ; 3809.71,3690.29 cw(c3853.27,3646.73) 3853.27,3708.34 ; v1@3826.1,3691.44 cw(c3820.36,3681.49) 3831.45,3684.47 ; v1@3826.1,3691.44 cw(c3820.36,3681.49) 3831.45,3684.47 ; v1@3826.1,3691.44 cw(c3820.36,3681.49) 3831.45,3684.47
  Bottom Layer w95: J1.5@4159.84,2766.34 4159.84,2805.64 4219.04,2864.84 4300.64,2864.84 4301.37,2864.11 4318.31,2864.11 4319.04,2864.84 4362.99,2864.84 4486.34,2988.19 4486.34,3039.37
  Bottom Layer w100: 4356.42,3656.5 4381.02,3656.5 ; 4397.08,3642.6 4483.46,3556.22 4483.46,3429.13
  other v1: 3700.79,3661.42 3720.47,3661.42 3740.16,3661.42 3759.84,3661.42 3779.53,3661.42 3799.21,3661.42 3818.9,3661.42 3700.79,3681.1 3720.47,3681.1 3740.16,3681.1 3759.84,3681.1 3779.53,3681.1 3799.21,3681.1 3818.9,3681.1 3700.79,3700.79 3720.47,3700.79 3740.16,3700.79 3759.84,3700.79 3779.53,3700.79 3799.21,3700.79 3818.9,3700.79 3700.79,3720.47 3720.47,3720.47 3740.16,3720.47 3759.84,3720.47 3779.53,3720.47 3799.21,3720.47 3818.9,3720.47
pads on no net: J1.4 J1.6 J1.7 J1.8 J1.9 J1.10 J1.11 J1.12 J1.13 J1.14 J1.15 J1.16 J1.17 J1.18 J1.19 J1.20 J1.21 J1.22 J1.23 J1.24 J1.25 J1.28 J2.0 U3.3 U3.4

## Polygon pours and split planes (outlines as drawn)
GND on Bottom Layer "Keep-Out Layer-No Net" (solid, remove dead copper, pour order 2): 2927.31,3274.71 cw(c2932.06,3269.96) 2932.06,3276.68 3409.59,3276.68 3410.38,3276.68 ccw(c3410.38,3314.08) 3447.78,3314.08 3447.78,3902.27 4641.09,3902.27 4669.04,3902.27 4669.04,2731.41 4669.04,2683.77 2926.52,2683.77

## Keep-outs
Keep-Out Layer:
  lines w10: 3404.84,3271.12 2984.88,3271.12 ccw(c2984.88,3221.12) 2934.88,3221.12 2934.88,2736.12 ccw(c2984.88,2736.12) 2984.88,2686.12 3991.22,2686.12 ; 3404.84,3271.34 ccw(c3404.84,3321.34) 3454.84,3321.34 3454.84,3696.34 ; 4201.57,3088.58 4478.35,3088.58 4478.35,3369.68 4201.57,3369.68 4201.57,3088.58

## Other copper
Top Layer:
  rectangle net VIN: 3592.13,3583.86 3829.13,3732.68
  rectangle net ISP: 3857.09,2943.7 3907.87,3178.74
  rectangle net GND: 3706.3,3196.85 3866.54,3294.49
  rectangle net ISN: 3618.9,2818.5 4525.59,2892.52
  rectangle net ISN: 4447.24,2822.44 4525.98,3040.94
  rectangle net ISP: 4228.35,2918.9 4412.6,3086.22
  rectangle net ISP: 4192.99,2899.69 4262.28,3085.83
  rectangle net ISP: 3882.28,2899.69 4199.69,3179.61
  rectangle net GND: 3854.8,3186.3 4196.93,3297.32
  rectangle net NetC6_1: 4176.46,3373.62 4462.99,3446.46
  rectangle net NetC6_1: 4031.18,3305.98 4199.69,3398.5
  rectangle net GND: 3707.17,3271.73 4022.13,3375.67
  rectangle net VIN: 3591.73,3383.86 3949.29,3437.09
  text "Buck" at 3681.5,3840.55 h40 r180
  text "MAGI" at 3680.71,3787.4 h39.37 r180
Bottom Layer:
  rectangle net GND: 3932.64,3330.32 4056.65,3517.95
  rectangle net VIN: 4106.3,3614.17 4354.33,3657.48
  rectangle net VIN: 4067.72,3614.17 4125.27,3679.13
  rectangle net VIN: 3692.52,3614.17 4067.72,3731.89

## Silkscreen, mask and mechanical layers (free items; w line width, h text height)
Top Overlay:
  text "4.7K" at 4120.87,3628.35 h39.37
  text "1nF" at 4101.18,3624.8 h39.37 r90
  text "20K" at 3929.13,3620.87 h39.37 r90
  text "10K" at 4024.41,3620.87 h39.37 r90
  text "MCP3421" at 4279.92,3604.33 h39.37
  text "LED>" at 4125.59,3557.87 h39.37
  text "10nF" at 3725.2,3523.62 h39.37
  text "10uF" at 4131.1,3479.92 h39.37
  text "0.1uF" at 4269.69,3458.66 h39.37
  text "51K" at 3726.77,3450.79 h39.37
  text "50V" at 3733.86,3358.66 h39.37
  text "10uF" at 3720.87,3298.43 h39.37
  text "8.2uH" at 4261.42,3215.35 h39.37
  text "10uF" at 3759.84,3140.16 h39.37 r90
  text "10uF" at 3835.04,3140.16 h39.37 r90
  text "4.7K" at 3685.43,3138.19 h39.37 r90
  text "100uF" at 4137.01,3107.09 h39.37 r90
  text "HT7333" at 3662.6,3038.98 h39.37
  text "330uF" at 3970.87,3030.32 h39.37 r90
  text "4.7K" at 3647.64,2980.71 h39.37 r90
  text "10m" at 4304.72,2949.61 h39.37
  text "TPS2513" at 3365.75,2768.11 h39.37
  text "10uF" at 3667.72,2737.01 h39.37 r90
Top Solder:
  lines w50: 3352.36,3068.11 3352.36,3064.61 3522.09,2894.88 3587.93,2894.88 3612.74,2870.08 ; 3614.31,2868.5 3634.25,2868.5 3695.28,2868.5 ; 3713.39,2854.33 4492.91,2854.33
Bottom Solder:
  rectangle: 3922.8,3314.57 4056.65,3527.17

## Text inside footprints (layer, text, board x,y; h text height)
J1: Bottom Overlay "AREF" at 4015.28,2876.5 h31.5 r180; Bottom Overlay "5V" at 3935.28,2876.5 h31.5 r180; Bottom Overlay "3V3" at 3825.28,2876.5 h31.5 r180; Bottom Overlay "GND" at 3720.28,2876.5 h31.5 r180; Bottom Overlay "RST" at 3600.87,3016.26 h39.37 r180; Bottom Overlay "A5" at 3600.87,3117.09 h39.37 r180; Bottom Overlay "A4" at 3600.87,3217.93 h39.37 r180; Bottom Overlay "A3" at 3600.87,3318.76 h39.37 r180; Bottom Overlay "A2" at 3600.87,3419.59 h39.37 r180; Bottom Overlay "A1" at 3600.87,3520.43 h39.37 r180; Bottom Overlay "A0" at 3600.87,3621.26 h39.37 r180; Bottom Overlay "D13" at 3720.87,3753.39 h31.5 r180; Bottom Overlay "D12" at 3819.87,3753.39 h31.5 r180; Bottom Overlay "D11" at 3929.36,3753.39 h31.5 r180; Bottom Overlay "D10" at 4017.87,3753.39 h31.5 r180; Bottom Overlay "D9" at 4127.86,3751.26 h39.37 r180; Bottom Overlay "D8" at 4226.86,3751.26 h39.37 r180; Bottom Overlay "D7" at 4325.87,3751.26 h39.37 r180; Bottom Overlay "D6" at 4450.87,3616.26 h39.37 r180; Bottom Overlay "D5" at 4450.87,3516.26 h39.37 r180; Bottom Overlay "D4" at 4450.87,3416.26 h39.37 r180; Bottom Overlay "D3" at 4450.87,3316.26 h39.37 r180; Bottom Overlay "D2" at 4450.87,3216.26 h39.37 r180; Bottom Overlay "D1" at 4450.87,3116.26 h39.37 r180; Bottom Overlay "D0" at 4450.87,3016.26 h39.37 r180; Bottom Layer "MAGI" at 3539.84,3811.34 h31.5 r180